# EAGLE board table-tennis-scoreboard (EAGLE 7.6.0)

Size 73.58 x 63.39 mm. Coordinates in mm from the lower left corner, seen from the top.
Outline: 0,0 56.82,0 56.82,53.33 0,53.33 0,0
Copper layers (1*16): Top 0.035mm / dielectric 1.5mm / Bottom 0.035mm
Design rules "default": minimum track width 10mil, minimum drill 24mil, track to track 8mil, track to pad 8mil, pad to pad 8mil, via to via 8mil, smd to smd 8mil, copper to edge 40mil, drill to drill 8mil, minimum pad ring 10mil, minimum via ring 8mil, stop-mask expansion 4mil, vias tented up to drill 0mil, thermal gap 10mil

## Footprints (pad centres in the part's own frame; a part is rotated, then mirrored left to right if it is on the bottom)
HDSP-M = drill 0.813 long: 1 -5.08,-7.62; 2 -2.54,-7.62; 3 0,-7.62; 4 2.54,-7.62; 5 5.08,-7.62; 6 5.08,7.62; 7 2.54,7.62; 8 0,7.62; 9 -2.54,7.62; 10 -5.08,7.62
0207/10 = drill 0.813 octagon: 1 -5.08,0; 2 5.08,0
TL1105 = drill 1 pad 1.676: 1 -2.25,3.25; 2 2.25,3.25; 3 -2.25,-3.25; 4 2.25,-3.25
DIL16 = drill 0.813 long: 1 -8.89,-3.81; 2 -6.35,-3.81; 3 -3.81,-3.81; 4 -1.27,-3.81; 5 1.27,-3.81; 6 3.81,-3.81; 7 6.35,-3.81; 8 8.89,-3.81; 9 8.89,3.81; 10 6.35,3.81; 11 3.81,3.81; 12 1.27,3.81; 13 -1.27,3.81; 14 -3.81,3.81; 15 -6.35,3.81; 16 -8.89,3.81
ARDUINO_UNO = drill 1.016 pad 1.88: 0 63.5,50.8; 1 60.96,50.8; 2 58.42,50.8; 3 55.88,50.8; 3.3V 35.56,2.54; 4 53.34,50.8; 5 50.8,50.8; 5V 38.1,2.54; 6 48.26,50.8; 7 45.72,50.8; 8 41.656,50.8; 9 39.116,50.8; 10 36.576,50.8; 11 34.036,50.8; 12 31.496,50.8; 13 28.956,50.8; A0 50.8,2.54; A1 53.34,2.54; A2 55.88,2.54; A3 58.42,2.54; A4 60.96,2.54; A5 63.5,2.54; AREF 23.876,50.8; GND 26.416,50.8; GND. 43.18,2.54; GND.. 40.64,2.54; I/OREF 30.48,2.54; N/C 27.94,2.54; RESET 33.02,2.54; SCL 18.796,50.8; SDA 21.336,50.8; VIN 45.72,2.54 | hole 3.2: 66.04,7.62; 66.04,35.56; 15.24,50.8; 13.97,2.54

## Placement (x,y rotation side)
Digit1  [HDSP-M]  5,22.78 0 top
Digit2  [HDSP-M]  5,187.88 0 top  (outside the outline)
Digit3  [HDSP-M]  5,73.58 0 top
Digit4  [HDSP-M]  5,200.58 0 top  (outside the outline)
Digit5  [HDSP-M]  5,111.68 0 top  (outside the outline)
Digit6  [HDSP-M]  5,149.78 0 top  (outside the outline)
R1  1k‎Ω  [0207/10]  5,86.28 0 top  (outside the outline)
R3  1k‎Ω  [0207/10]  5,276.78 0 top  (outside the outline)
R3  1k‎Ω  [0207/10]  5,276.78 0 top  (outside the outline)
R4  1k‎Ω  [0207/10]  5,175.18 0 top  (outside the outline)
R7  1k‎Ω  [0207/10]  5,251.38 0 top  (outside the outline)
R9  1k‎Ω  [0207/10]  5,238.68 0 top  (outside the outline)
R10  1k‎Ω  [0207/10]  5,48.18 0 top
S1  [TL1105]  5,162.48 0 top  (outside the outline)
S2  [TL1105]  5,98.98 0 top  (outside the outline)
U1  [DIL16]  5,35.48 0 top
U2  [ARDUINO_UNO]  5,10.08 0 top
U3  [DIL16]  5,60.88 0 top
U4  [DIL16]  5,213.28 0 top  (outside the outline)
U5  [DIL16]  5,124.38 0 top  (outside the outline)
U6  [DIL16]  5,137.08 0 top  (outside the outline)
U7  [DIL16]  5,225.98 0 top  (outside the outline)

## Library data of the parts
Digit1-Digit6 R1 R3 R3 R4 R7 R9 R10 S1 S2 U1-U7 = AUTODESK_CIRCUITS_BREADBOARD

## Nets
N$1: R4.1 U1.8
N$2: U1.9 U3.14
N$3: Digit1.5 U1.7
N$4: Digit1.10 U1.6
N$5: Digit1.9 U1.5
N$6: Digit1.1 U1.4
N$7: Digit1.2 U1.3
N$8: Digit1.4 U1.2
N$9: Digit1.7 U1.15
N$10: Digit1.6 U1.1
N$11: Digit3.6 U3.1
N$12: Digit3.1 U3.4
N$13: Digit3.10 U3.6
N$14: Digit3.5 U3.7
N$15: R1.1 U3.8
N$16: Digit3.4 U3.2
N$17: Digit3.9 U3.5
N$18: Digit3.7 U3.15
N$19: Digit3.2 U3.3
N$20: U3.9 U7.14
N$21: U2.10 U4.11 U5.11 U6.11
N$22: Digit5.10 U5.6
N$23: U2.9 U4.12 U5.12 U6.12
N$24: Digit5.9 U5.5
N$25: Digit5.1 U5.4
N$26: Digit5.2 U5.3
N$27: Digit5.7 U5.15
N$28: Digit5.4 U5.2
N$29: Digit5.6 U5.1
N$30: Digit6.7 U6.15
N$31: Digit6.6 U6.1
N$32: Digit6.4 U6.2
N$33: Digit6.2 U6.3
N$34: Digit6.1 U6.4
N$35: Digit6.9 U6.5
N$36: Digit6.10 U6.6
N$37: U5.9 U6.14
N$38: U2.8 U5.14
N$39: U4.14 U6.9
N$40: U6.7
N$41: U5.7
N$42: U1.11 U2.7 U3.11 U7.11
N$43: U1.12 U2.6 U3.12 U7.12
N$44: U1.14 U2.5
N$45: R3.1 S2.3
N$46: R7.2 S1.3
N$47: S2.1 U2.2
N$48: S1.1 U2.3
N$49: Digit1.8 Digit3.8 R10.1
N$50: Digit2.6 U4.1
N$51: Digit2.1 U4.4
N$52: Digit2.10 U4.6
N$53: U4.7
N$54: Digit2.4 U4.2
N$55: Digit2.9 U4.5
N$56: Digit2.2 U4.3
N$57: U4.9
N$58: Digit2.7 U4.15
N$59: Digit4.6 U7.1
N$60: Digit4.1 U7.4
N$61: Digit4.10 U7.6
N$62: Digit4.2 U7.7
N$63: U7.8
N$64: Digit4.4 U7.2
N$65: R1.2 R3.1 R3.2 R4.2 R7.1 R9.2 R10.2 U1.13 U2.GND.. U3.13 U7.13
N$66: Digit4.9 U7.5
N$67: Digit4.7 U7.15
N$68: Digit4.5 U7.3
N$69: U7.9
N$70: S1.4 S2.4 U1.10 U1.16 U2.5V U3.10 U3.16 U4.10 U4.16 U5.10 U5.16 U6.10 U6.16 U7.10 U7.16
N$71: Digit2.8 Digit5.8 Digit6.8 R9.1 U4.8 U4.13 U5.8 U5.13 U6.8 U6.13
N$72: Digit4.8 R3.2

## Tracks (layer width: path | path; a pad name or v marks a point on that pad's centre or on a via)
N$1  (1 unrouted)
N$2  (1 unrouted)
N$3  (1 unrouted)
N$4  (1 unrouted)
N$5  (1 unrouted)
N$6  (1 unrouted)
N$7  (1 unrouted)
N$8  (1 unrouted)
N$9  (1 unrouted)
N$10  (1 unrouted)
N$11  (1 unrouted)
N$12  (1 unrouted)
N$13  (1 unrouted)
N$14  (1 unrouted)
N$15  (1 unrouted)
N$16  (1 unrouted)
N$17  (1 unrouted)
N$18  (1 unrouted)
N$19  (1 unrouted)
N$20  (1 unrouted)
N$21  (3 unrouted)
N$22  (1 unrouted)
N$23  (3 unrouted)
N$24  (1 unrouted)
N$25  (1 unrouted)
N$26  (1 unrouted)
N$27  (1 unrouted)
N$28  (1 unrouted)
N$29  (1 unrouted)
N$30  (1 unrouted)
N$31  (1 unrouted)
N$32  (1 unrouted)
N$33  (1 unrouted)
N$34  (1 unrouted)
N$35  (1 unrouted)
N$36  (1 unrouted)
N$37  (1 unrouted)
N$38  (1 unrouted)
N$39  (1 unrouted)
N$42  (3 unrouted)
N$43  (3 unrouted)
N$44  (1 unrouted)
N$45  (1 unrouted)
N$46  (1 unrouted)
N$47  (1 unrouted)
N$48  (1 unrouted)
N$49  (2 unrouted)
N$50  (1 unrouted)
N$51  (1 unrouted)
N$52  (1 unrouted)
N$54  (1 unrouted)
N$55  (1 unrouted)
N$56  (1 unrouted)
N$58  (1 unrouted)
N$59  (1 unrouted)
N$60  (1 unrouted)
N$61  (1 unrouted)
N$62  (1 unrouted)
N$64  (1 unrouted)
N$65  (10 unrouted)
N$66  (1 unrouted)
N$67  (1 unrouted)
N$68  (1 unrouted)
N$70  (14 unrouted)
N$71  (9 unrouted)
N$72  (1 unrouted)